# EAGLE board highbay (EAGLE 9.3.2)
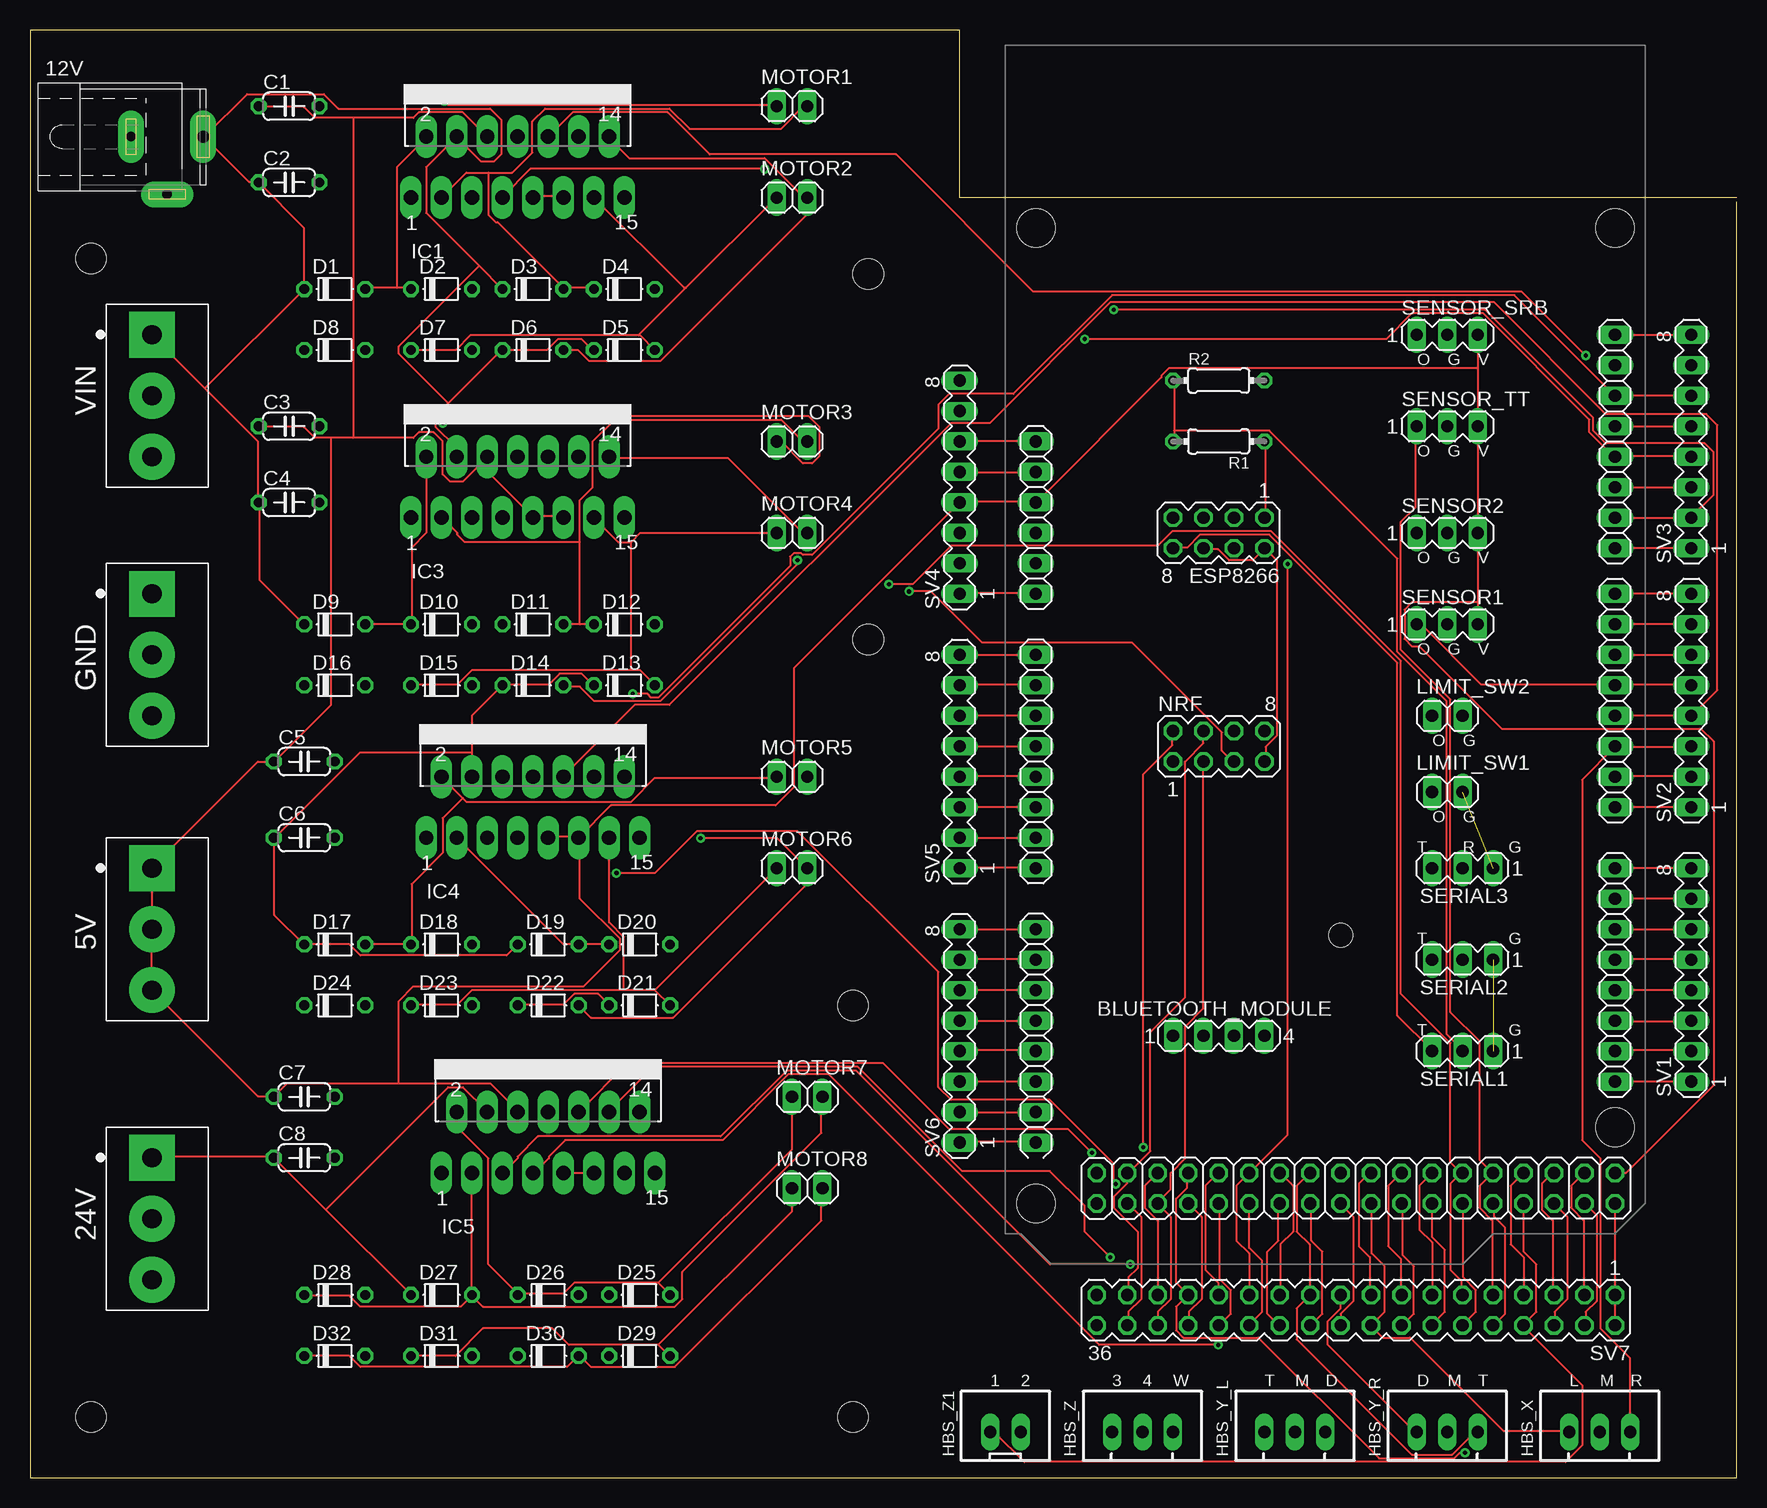
[diagram p0: board, top side]
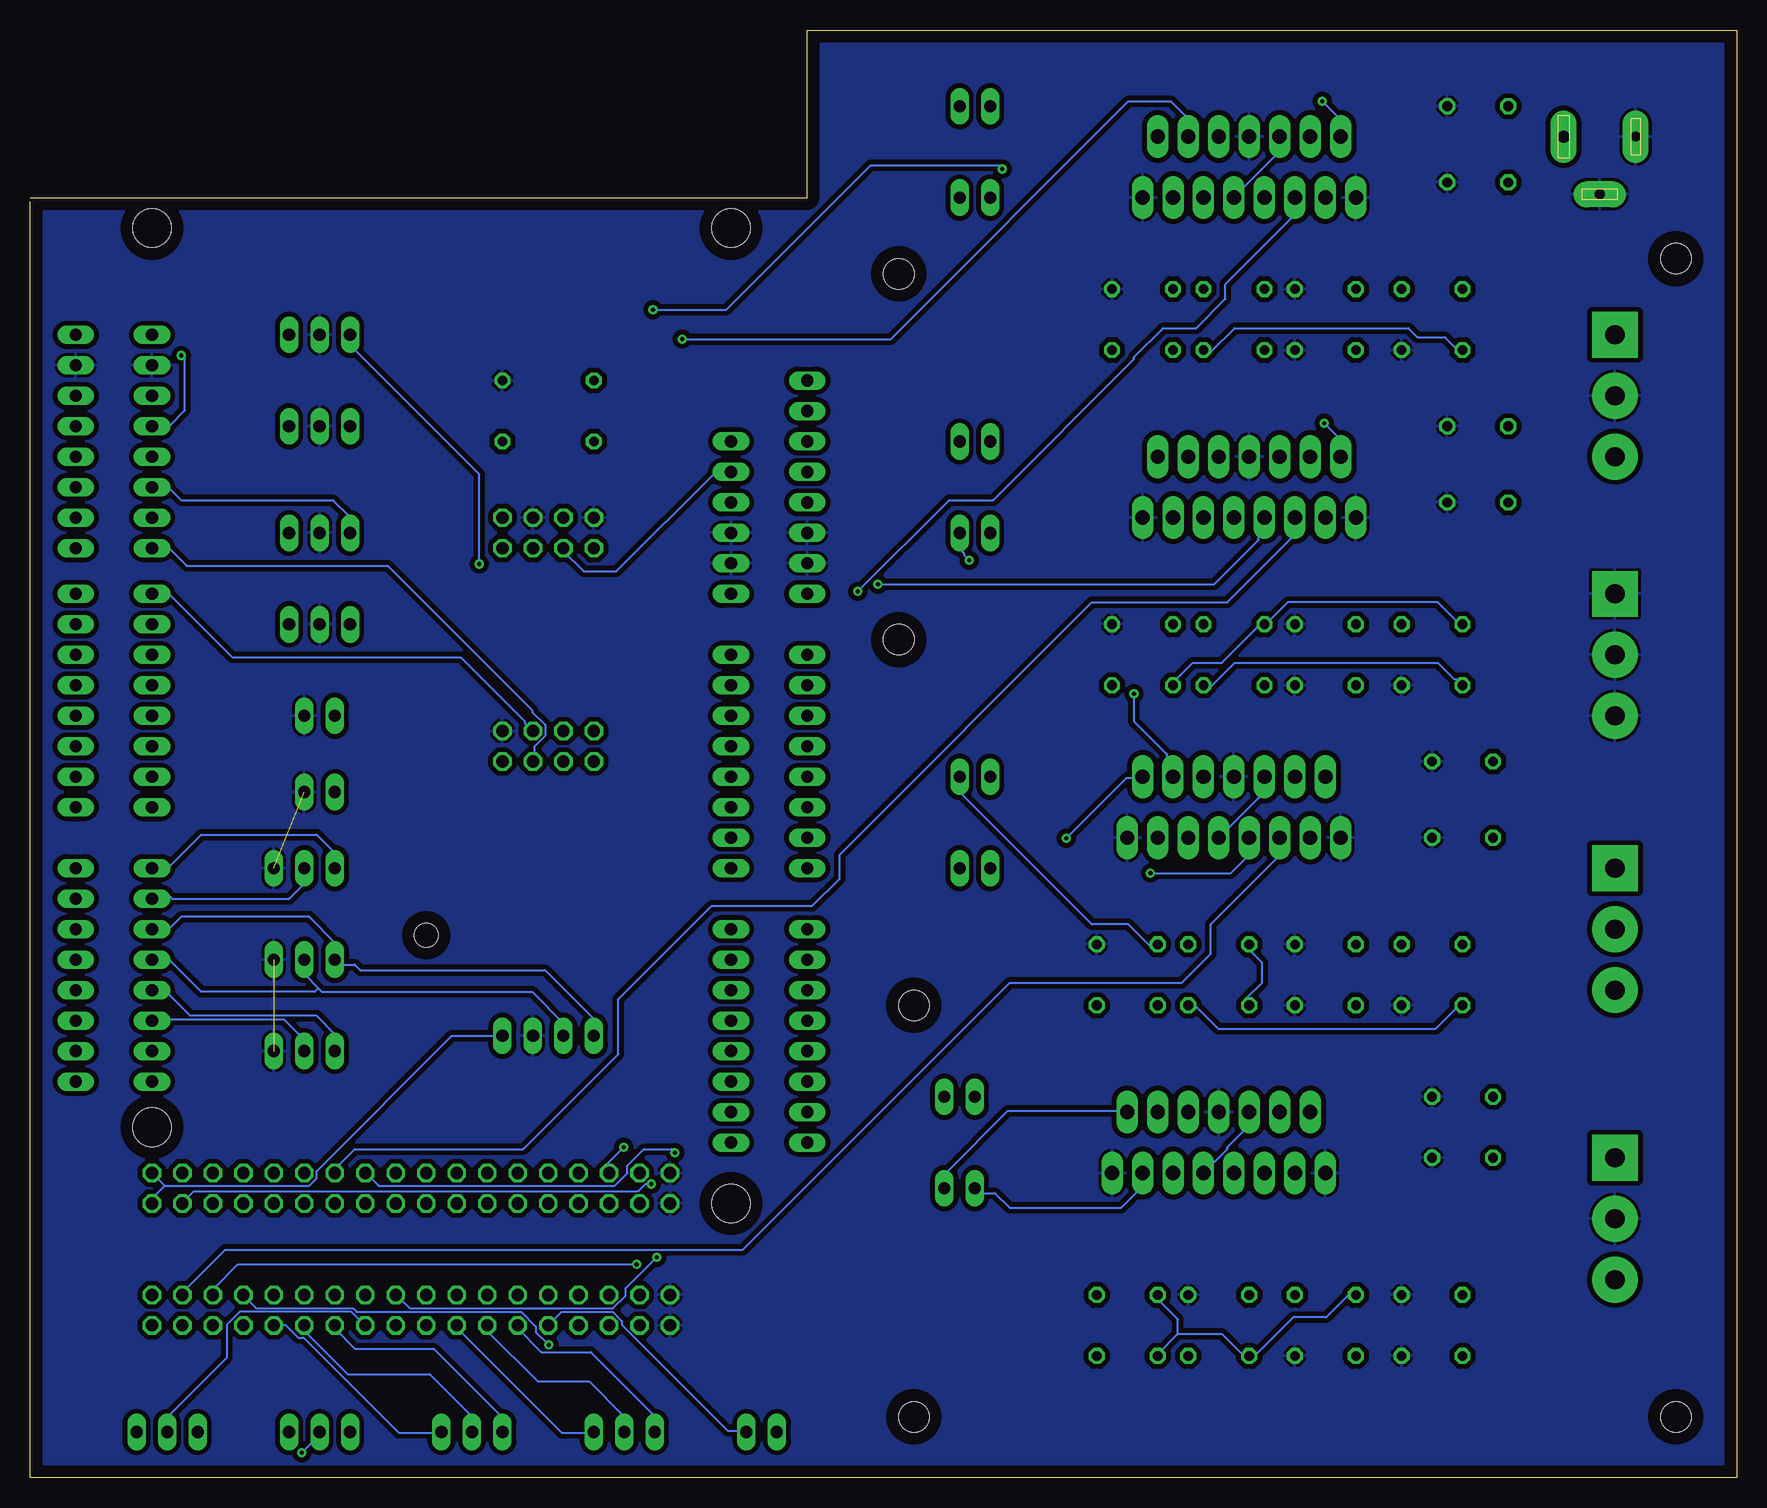
[diagram p1: board, bottom side, seen from below]

Size 142.24 x 120.65 mm. Coordinates in mm from the lower left corner, seen from the top.
Outline: 142.22,106.35 142.22,0 0,0 0,120.65 77.47,120.65 77.47,106.68 142.24,106.68
Copper layers (1*16): Top 0.035mm / dielectric 1.5mm / Bottom 0.035mm
Design rules "default": minimum track width 6mil, minimum drill 0.35mm, track to track 6mil, track to pad 6mil, pad to pad 6mil, via to via 6mil, smd to smd 6mil, copper to edge 40mil, drill to drill 6mil, minimum pad ring 10mil, minimum via ring 8mil, stop-mask expansion 4mil, vias tented up to drill 0mil, thermal gap 10mil
Holes 2.54 mm at 5.08,5.08 5.08,101.6 69.85,100.33 68.58,5.08 68.58,39.37 69.85,69.85

## Footprints (pad centres in the part's own frame; a part is rotated, then mirrored left to right if it is on the bottom)
TERMINALBLOCK_PLUGGABLE-3-5.08MM = drill 1.6 pad 3.81 square: 1 -5.08,0 | drill 1.6 pad 3.81: 2 0,0; 3 5.08,0
SPC4077 = drill 0.8 pad 2.184 long: 1 -3,0; 2 0,-4.8 | drill 1 pad 2.184 long: 3 3,0
MA04-1 = drill 1.016 long: 1 -3.81,0; 2 -1.27,0; 3 1.27,0; 4 3.81,0
C050-024X044 = drill 0.813 octagon: 1 -2.54,0; 2 2.54,0
D-5 = drill 0.813 octagon: A 2.54,0; C -2.54,0
MA04-2 = drill 1.016 octagon: 1 -3.81,-1.27; 2 -3.81,1.27; 3 -1.27,-1.27; 4 -1.27,1.27; 5 1.27,-1.27; 6 1.27,1.27; 7 3.81,-1.27; 8 3.81,1.27
JST-XH-03-PACKAGE-LONG-PAD = drill 1.016 long: 1 -2.54,0; 2 0,0; 3 2.54,0
JST-XH-02-PACKAGE-LONG-PAD = drill 1.016 long: 1 -1.27,0; 2 1.27,0
MULTIWATT-15 = drill 1.2 long: 1 -8.89,-7.62; 2 -7.62,-2.54; 3 -6.35,-7.62; 4 -5.08,-2.54; 5 -3.81,-7.62; 6 -2.54,-2.54; 7 -1.27,-7.62; 8 0,-2.54; 9 1.27,-7.62; 10 2.54,-2.54; 11 3.81,-7.62; 12 5.08,-2.54; 13 6.35,-7.62; 14 7.62,-2.54; 15 8.89,-7.62
MEGA_ARDUINO_1 = drill 1.016 long: 1 33.02,2.54; 2 35.56,2.54; 3 38.1,2.54; 4 40.64,2.54; 5 43.18,2.54; 6 45.72,2.54; 7 50.8,2.54; 8 53.34,2.54; 9 55.88,2.54; 10 58.42,2.54; 11 60.96,2.54; 12 63.5,2.54; 13 66.04,2.54; 14 68.58,2.54; 15 73.66,2.54; 16 76.2,2.54; 17 78.74,2.54; 18 81.28,2.54; 19 83.82,2.54; 20 86.36,2.54; 21 88.9,2.54; 22 91.44,2.54; 23 86.36,50.8; 24 83.82,50.8; 25 81.28,50.8; 26 78.74,50.8; 27 76.2,50.8; 28 73.66,50.8; 29 71.12,50.8; 30 68.58,50.8; 31 63.5,50.8; 32 60.96,50.8; 33 58.42,50.8; 34 55.88,50.8; 35 53.34,50.8; 36 50.8,50.8; 37 48.26,50.8; 38 45.72,50.8; 39 41.91,50.8; 40 39.37,50.8; 41 36.83,50.8; 42 34.29,50.8; 43 31.75,50.8; 44 29.21,50.8; 45 26.67,50.8; 46 24.13,50.8 | drill 1.016 octagon: 47 93.98,50.8; 48 96.52,50.8; 49 93.98,48.26; 50 96.52,48.26; 51 93.98,45.72; 52 96.52,45.72; 53 93.98,43.18; 54 96.52,43.18; 55 93.98,40.64; 56 96.52,40.64; 57 93.98,38.1; 58 96.52,38.1; 59 93.98,35.56; 60 96.52,35.56; 61 93.98,33.02; 62 96.52,33.02; 63 93.98,30.48; 64 96.52,30.48; 65 93.98,27.94; 66 96.52,27.94; 67 93.98,25.4; 68 96.52,25.4; 69 93.98,22.86; 70 96.52,22.86; 71 93.98,20.32; 72 96.52,20.32; 73 93.98,17.78; 74 96.52,17.78; 75 93.98,15.24; 76 96.52,15.24; 77 93.98,12.7; 78 96.52,12.7; 79 93.98,10.16; 80 96.52,10.16; 81 93.98,7.62; 82 96.52,7.62 | hole 3.2: 15.24,50.8; 15.24,2.54; 90.17,50.8; 96.52,2.54 | hole 2: 74.168,27.94
1X02 = drill 1.016 long: 1 -1.27,0; 2 1.27,0
0204/7 = drill 0.813 octagon: 1 -3.81,0; 2 3.81,0
MA03-1 = drill 1.016 long: 1 -2.54,0; 2 0,0; 3 2.54,0
MA08-1 = drill 1.016 long: 1 -8.89,0; 2 -6.35,0; 3 -3.81,0; 4 -1.27,0; 5 1.27,0; 6 3.81,0; 7 6.35,0; 8 8.89,0
MA18-2 = drill 1.016 octagon: 1 -21.59,-1.27; 2 -21.59,1.27; 3 -19.05,-1.27; 4 -19.05,1.27; 5 -16.51,-1.27; 6 -16.51,1.27; 7 -13.97,-1.27; 8 -13.97,1.27; 9 -11.43,-1.27; 10 -11.43,1.27; 11 -8.89,-1.27; 12 -8.89,1.27; 13 -6.35,-1.27; 14 -6.35,1.27; 15 -3.81,-1.27; 16 -3.81,1.27; 17 -1.27,-1.27; 18 -1.27,1.27; 19 1.27,-1.27; 20 1.27,1.27; 21 3.81,-1.27; 22 3.81,1.27; 23 6.35,-1.27; 24 6.35,1.27; 25 8.89,-1.27; 26 8.89,1.27; 27 11.43,-1.27; 28 11.43,1.27; 29 13.97,-1.27; 30 13.97,1.27; 31 16.51,-1.27; 32 16.51,1.27; 33 19.05,-1.27; 34 19.05,1.27; 35 21.59,-1.27; 36 21.59,1.27

## Placement (x,y rotation side)
5V  691311500003  [TERMINALBLOCK_PLUGGABLE-3-5.08MM]  10.16,45.72 270 top
12V  [SPC4077]  11.43,111.76 0 top
24V  691311500003  [TERMINALBLOCK_PLUGGABLE-3-5.08MM]  10.16,21.59 270 top
BLUETOOTH_MODULE  [MA04-1]  99.06,36.83 0 top
C1  100nF  [C050-024X044]  21.59,114.3 0 top
C2  100nF  [C050-024X044]  21.59,107.95 0 top
C3  100nF  [C050-024X044]  21.59,87.63 0 top
C4  100nF  [C050-024X044]  21.59,81.28 0 top
C5  100nF  [C050-024X044]  22.86,59.69 0 top
C6  100nF  [C050-024X044]  22.86,53.34 0 top
C7  100nF  [C050-024X044]  22.86,31.75 0 top
C8  100nF  [C050-024X044]  22.86,26.67 0 top
D1  [D-5]  25.4,99.06 0 top
D2  [D-5]  34.29,99.06 0 top
D3  [D-5]  41.91,99.06 0 top
D4  [D-5]  49.53,99.06 0 top
D5  [D-5]  49.53,93.98 0 top
D6  [D-5]  41.91,93.98 0 top
D7  [D-5]  34.29,93.98 0 top
D8  [D-5]  25.4,93.98 0 top
D9  [D-5]  25.4,71.12 0 top
D10  [D-5]  34.29,71.12 0 top
D11  [D-5]  41.91,71.12 0 top
D12  [D-5]  49.53,71.12 0 top
D13  [D-5]  49.53,66.04 0 top
D14  [D-5]  41.91,66.04 0 top
D15  [D-5]  34.29,66.04 0 top
D16  [D-5]  25.4,66.04 0 top
D17  [D-5]  25.4,44.45 0 top
D18  [D-5]  34.29,44.45 0 top
D19  [D-5]  43.18,44.45 0 top
D20  [D-5]  50.8,44.45 0 top
D21  [D-5]  50.8,39.37 0 top
D22  [D-5]  43.18,39.37 0 top
D23  [D-5]  34.29,39.37 0 top
D24  [D-5]  25.4,39.37 0 top
D25  [D-5]  50.8,15.24 0 top
D26  [D-5]  43.18,15.24 0 top
D27  [D-5]  34.29,15.24 0 top
D28  [D-5]  25.4,15.24 0 top
D29  [D-5]  50.8,10.16 0 top
D30  [D-5]  43.18,10.16 0 top
D31  [D-5]  34.29,10.16 0 top
D32  [D-5]  25.4,10.16 0 top
ESP8266  [MA04-2]  99.06,78.74 180 top
GND  691311500003  [TERMINALBLOCK_PLUGGABLE-3-5.08MM]  10.16,68.58 270 top
HBS_X  JST-XH-03-PIN-LONG-PAD  [JST-XH-03-PACKAGE-LONG-PAD]  130.81,3.81 0 top
HBS_Y_L  JST-XH-03-PIN-LONG-PAD  [JST-XH-03-PACKAGE-LONG-PAD]  105.41,3.81 0 top
HBS_Y_R  JST-XH-03-PIN-LONG-PAD  [JST-XH-03-PACKAGE-LONG-PAD]  118.11,3.81 0 top
HBS_Z  JST-XH-03-PIN-LONG-PAD  [JST-XH-03-PACKAGE-LONG-PAD]  92.71,3.81 0 top
HBS_Z1  JST-XH-02-PIN-LONG-PAD  [JST-XH-02-PACKAGE-LONG-PAD]  81.28,3.81 0 top
IC1  L298  [MULTIWATT-15]  40.64,114.3 0 top
IC2  [MEGA_ARDUINO_1]  81.28,119.38 270 top
IC3  L298  [MULTIWATT-15]  40.64,87.63 0 top
IC4  L298  [MULTIWATT-15]  41.91,60.96 0 top
IC5  L298  [MULTIWATT-15]  43.18,33.02 0 top
LIMIT_SW1  [1X02]  118.11,57.15 0 top
LIMIT_SW2  [1X02]  118.11,63.5 0 top
MOTOR1  [1X02]  63.5,114.3 0 top
MOTOR2  [1X02]  63.5,106.68 0 top
MOTOR3  [1X02]  63.5,86.36 0 top
MOTOR4  [1X02]  63.5,78.74 0 top
MOTOR5  [1X02]  63.5,58.42 0 top
MOTOR6  [1X02]  63.5,50.8 0 top
MOTOR7  [1X02]  64.77,31.75 0 top
MOTOR8  [1X02]  64.77,24.13 0 top
NRF  [MA04-2]  99.06,60.96 0 top
R1  1k  [0204/7]  99.06,86.36 180 top
R2  2k2  [0204/7]  99.06,91.44 0 top
SENSOR1  [MA03-1]  118.11,71.12 0 top
SENSOR2  [MA03-1]  118.11,78.74 0 top
SENSOR_SRB  [MA03-1]  118.11,95.25 0 top
SENSOR_TT  [MA03-1]  118.11,87.63 0 top
SERIAL1  [MA03-1]  119.38,35.56 180 top
SERIAL2  [MA03-1]  119.38,43.18 180 top
SERIAL3  [MA03-1]  119.38,50.8 180 top
SV1  [MA08-1]  138.43,41.91 90 top
SV2  [MA08-1]  138.43,64.77 90 top
SV3  [MA08-1]  138.43,86.36 90 top
SV4  [MA08-1]  77.47,82.55 90 top
SV5  [MA08-1]  77.47,59.69 90 top
SV6  [MA08-1]  77.47,36.83 90 top
SV7  [MA18-2]  110.49,13.97 180 top
VIN  691311500003  [TERMINALBLOCK_PLUGGABLE-3-5.08MM]  10.16,90.17 270 top

## Library data of the parts
5V 24V GND VIN = Terminal Blocks; CREATED_BY: PCBLayout.com; DIGIKEY_PART_NO: 732-2053-ND; MANUFACTURER: WURTH ELEKTRONIK; MPN: 691311500003
12V = con-jack; OC_FARNELL: unknown; OC_NEWARK: unknown
BLUETOOTH_MODULE ESP8266 NRF SENSOR1 SENSOR2 SENSOR_SRB SENSOR_TT SERIAL1-SERIAL3 SV1-SV7 = con-lstb; OC_FARNELL: unknown; OC_NEWARK: unknown
C1-C8 = rcl
D1-D32 = diode
HBS_X HBS_Y_L HBS_Y_R HBS_Z HBS_Z1 = Rembrandt Electronics - JST XH Connectors v1-0
IC1 IC3-IC5 = st-microelectronics; MPN: L298N; OC_FARNELL: 1589425; OC_NEWARK: 32M1527
IC2 = arduino
LIMIT_SW1 LIMIT_SW2 MOTOR1-MOTOR8 = pinhead
R1 R2 = rcl; SPICEPREFIX: R

## Nets
2: HBS_X.3 IC2.33 SV2.3
3: IC2.34 IC4.10 SV2.4
3V3: ESP8266.2 ESP8266.6 IC2.2 NRF.7 SV4.5
4: IC2.35 SENSOR1.1 SV2.5
5: IC2.36 SV2.6
5V: 5V.1 5V.2 5V.3 BLUETOOTH_MODULE.4 C1.1 C3.1 C5.1 C7.1 IC1.6 IC1.9 IC1.11 IC2.3 IC2.47 IC2.48 IC3.6 IC3.9 IC3.11 IC4.6 IC4.9 IC4.11 IC5.6 IC5.9 IC5.11 SENSOR1.3 SENSOR2.3 SENSOR_SRB.3 SENSOR_TT.3 SV4.4 SV7.1 SV7.2
6: IC2.37 SV2.7
7: IC2.38 NRF.6 SV2.8
8: IC1.5 IC2.39 NRF.5 SV3.1
9: IC1.7 IC2.40 SV3.2
10: IC2.41 SENSOR2.1 SV3.3
11: IC1.12 IC2.42 SV3.4
12: IC1.10 IC2.43 SV3.5
13: IC2.44 IC4.12 SV3.6
20: LIMIT_SW1.1
21: LIMIT_SW2.1
22: IC2.49 IC4.5 SV7.3
23: IC2.50 IC4.7 SV7.4
24: IC2.51 IC5.5 SV7.5
24V: 24V.1 C8.1 D25.C D27.C D29.C D30.C IC5.4
25: IC2.52 SV7.6
26: IC2.53 IC5.7 SV7.7
27: HBS_Z1.1 IC2.54 SV7.8
28: IC2.55 SENSOR_TT.1 SV7.9
29: HBS_Y_L.3 IC2.56 SV7.10
30: IC2.57 IC3.7 SV7.11
31: HBS_Y_L.2 IC2.58 SV7.12
32: IC2.59 IC3.5 SV7.13
33: HBS_Y_L.1 IC2.60 SV7.14
34: IC2.61 IC5.10 SV7.15
35: HBS_X.2 IC2.62 SV7.16
36: IC2.63 IC5.12 SV7.17
37: HBS_X.1 IC2.64 SV7.18
38: HBS_Y_R.1 SV7.19
39: IC2.66 SV7.20
40: HBS_Y_R.3 IC2.67 SV7.21
41: HBS_Z.3 IC2.68 SV7.22
42: IC2.69 SV7.23
43: HBS_Z.2 IC2.70 SV7.24
44: IC2.71 SENSOR_SRB.1 SV7.25
45: HBS_Z.1 IC2.72 SV7.26
46: IC2.73 SV7.27
47: HBS_Z1.2 IC2.74 SV7.28
48: HBS_Y_R.2 IC2.75 SV7.29
49: IC2.76 SV7.30
A0: IC2.7 SV5.8
A1: IC2.8 SV5.7
A2: IC2.9 SV5.6
A3: IC2.10 SV5.5
A4: IC2.11 SV5.4
A5: IC2.12 SV5.3
A6: IC2.13 SV5.2
A7: IC2.14 SV5.1
A8: IC2.15 SV6.8
A9: IC2.16 SV6.7
A10: IC2.17 SV6.6
A11: IC2.18 SV6.5
A12: IC2.19 SV6.4
A13: IC2.20 SV6.3
A14: IC2.21 SV6.2
A15: IC2.22 SV6.1
AREF: IC2.46 SV3.8
GND: 12V.1 12V.2 24V.2 BLUETOOTH_MODULE.3 C1.2 C2.2 C3.2 C4.2 C5.2 C6.2 C7.2 C8.2 D2.A D4.A D7.A D8.A D10.A D12.A D15.A D16.A D18.A D20.A D23.A D24.A D26.A D28.A D31.A D32.A ESP8266.3 ESP8266.7 GND.1 GND.2 GND.3 IC1.1 IC1.8 IC1.15 IC2.4 IC2.5 IC2.45 IC2.81 IC2.82 IC3.1 IC3.8 IC3.15 IC4.1 IC4.8 IC4.15 IC5.1 IC5.8 IC5.15 LIMIT_SW1.2 LIMIT_SW2.2 NRF.8 R2.2 SENSOR1.2 SENSOR2.2 SENSOR_SRB.2 SENSOR_TT.2 SERIAL1.1 SERIAL2.1 SERIAL3.1 SV3.7 SV4.2 SV4.3 SV7.35 SV7.36 VIN.2
MISO: IC2.77 NRF.2 SV7.31
MOSI: IC2.78 NRF.3 SV7.32
N$1: D1.A D2.C IC1.2 MOTOR1.1
N$2: D3.A D4.C IC1.3 MOTOR1.2
N$3: D6.A D8.C IC1.14 MOTOR2.2
N$4: D5.A D7.C IC1.13 MOTOR2.1
N$5: ESP8266.1 R1.1
N$7: D9.A D10.C IC3.2 MOTOR3.1
N$8: D11.A D12.C IC3.3 MOTOR3.2
N$9: D14.A D16.C IC3.14 MOTOR4.2
N$10: D13.A D15.C IC3.13 MOTOR4.1
N$11: D17.A D18.C IC4.2 MOTOR5.1
N$12: D19.A D20.C IC4.3 MOTOR5.2
N$13: D22.A D24.C IC4.14 MOTOR6.2
N$14: D21.A D23.C IC4.13 MOTOR6.1
N$15: D25.A D26.C IC5.2 MOTOR7.1
N$16: D27.A D28.C IC5.3 MOTOR7.2
N$17: SV4.8
N$18: SV4.7
N$19: D30.A D32.C IC5.14 MOTOR8.2
N$20: D29.A D31.C IC5.13 MOTOR8.1
N$21: IC2.65
N$22: NRF.1
R0: IC2.31 SV2.1
R1: IC2.25 R1.2 R2.1 SERIAL1.2 SV1.3
R2: BLUETOOTH_MODULE.2 IC2.27 SERIAL2.2 SV1.5
R3: IC2.29 SERIAL3.2 SV1.7
RESET: IC2.1 SV4.6
SCK: IC2.79 NRF.4 SV7.33
SCL: IC2.23 SV1.1
SDA: IC2.24 SV1.2
SS: IC2.80 SV7.34
T0: IC2.32 SV2.2
T1: ESP8266.8 IC2.26 SERIAL1.3 SV1.4
T2: BLUETOOTH_MODULE.1 IC2.28 SERIAL2.3 SV1.6
T3: IC2.30 SERIAL3.3 SV1.8
VI: IC2.6 SV4.1
VIN: 12V.3 C2.1 C4.1 C6.1 D1.C D3.C D5.C D6.C D9.C D11.C D13.C D14.C D17.C D19.C D21.C D22.C IC1.4 IC3.4 IC4.4 VIN.1

## Tracks (layer width: path | path; a pad name or v marks a point on that pad's centre or on a via)
2
  Top 0.152: 132.08,60.91 129.34,58.17 129.34,28.14 130.86,26.62 130.86,12.45 133.3,10.01 133.3,3.91 HBS_X.3 | 132.08,60.91 138.33,60.91 SV2.3 | 132.08,60.91 IC2.33
3
  Top 0.152: IC2.34 SV2.4 138.48,63.5 140.61,65.63 140.61,87.73 139.7,88.65 131.32,88.65 122.02,97.94 90.02,97.94 79.96,87.88 76.76,87.88 53.29,64.41 50.39,64.41 44.45,58.47 IC4.10
3V3
  Top 0.152: SV4.5 77.52,83.77 83.77,83.77 IC2.2 | NRF.7 102.97,59.69 102.97,60.91 103.89,61.82 103.89,76.45 ESP8266.2 102.82,77.37 101.91,76.45 99.92,76.45 99.01,77.37 97.79,77.37 ESP8266.6
  Bottom 0.152: ESP8266.6 97.79,77.22 96.11,75.54 93.37,75.54 85.14,83.77 83.92,83.77 IC2.2
4
  Top 0.152: 132.08,66.09 138.33,66.09 SV2.5 | SENSOR1.1 115.93,71.12 120.95,66.09 132.08,66.09 | 132.08,66.09 IC2.35
5
  Top 0.152: IC2.36 132.08,68.53 138.33,68.53 SV2.6
5V
  Top 0.152: IC3.11 44.45,80.11 42.01,80.11 IC3.9 41.86,80.11 37.59,84.38 37.44,84.38 | 26.92,86.67 31.95,86.67 32.41,87.12 33.63,87.12 34.39,86.36 34.39,83.62 35,83.01 36.07,83.01 37.44,84.38 | 26.92,86.67 25.09,86.67 | 25.09,86.67 23.72,86.67 22.81,87.58 19.15,87.58 C3.1 | 37.44,84.38 38.05,84.99 IC3.6 37.44,84.38 | IC1.9 42.01,106.78 44.45,106.78 IC1.11 | 26.92,113.34 31.95,113.34 32.41,113.79 36.07,113.79 IC1.6 | 26.92,113.34 23.72,113.34 22.81,114.25 19.15,114.25 C1.1 | 26.92,113.34 26.92,86.67 | IC4.9 43.23,53.44 45.67,53.44 IC4.11 | IC5.11 IC5.9 | 30.73,32.87 21.44,32.87 C7.1 20.22,31.8 19,31.8 5V.3 5V.2 5V.1 10.16,50.85 19,59.69 C5.1 20.37,59.69 25.09,64.41 25.09,86.67 | 30.73,32.87 38.35,32.87 40.64,30.58 IC5.6 | 30.73,32.87 30.73,39.73 31.95,40.95 46.13,40.95 49.17,43.99 49.17,44.91 45.82,48.26 45.82,53.29 IC4.11 | SV7.2 SV7.1 IC2.48 | 120.65,72.95 SENSOR2.3 SENSOR_TT.3 120.65,92.46 | 120.65,72.95 SENSOR1.3 | SENSOR_SRB.3 120.65,92.46 | 120.65,92.46 94.89,92.46 94.29,91.85 94.29,91.69 83.92,81.33 IC2.3 83.77,81.33 77.52,81.33 SV4.4 63.65,67.46 63.65,57.56 62.13,56.03 48.41,56.03 IC4.11 | IC2.47 132.99,25.4 140.31,32.72 140.31,61.37 139.24,62.43 122.63,62.43 115.77,69.29 115.16,69.29 114.55,69.9 114.55,72.34 115.16,72.95 120.65,72.95
  Bottom 0.152: IC1.9 41.86,106.78 38.2,110.44 38.2,111.66 IC1.6 | IC4.9 39.42,57.1 39.42,58.32 IC4.6 | IC5.6 40.64,29.36 42.47,27.53 42.47,27.38 IC5.9 | BLUETOOTH_MODULE.4 107.09,36.83 118.36,25.55 118.36,24.94 118.97,24.33 131.01,24.33 | IC2.47 131.01,24.33 | IC2.48 132.08,23.27 131.01,24.33
6
  Top 0.152: SV2.7 IC2.37
7
  Top 0.152: SV2.8 138.33,73.71 132.08,73.71 IC2.38
  Bottom 0.152: NRF.6 100.99,62.89 100.99,63.04 106.32,68.38 125.37,68.38 130.56,73.56 132.08,73.56 IC2.38
8  (via drill 0.35)
  Top 0.152: SV3.1 138.33,77.52 132.08,77.52 IC2.39 | v73.25,73.86 75.08,73.86 79.35,69.6 91.85,69.6 99.31,62.13 99.31,60.6 100.23,59.69 NRF.5
  Bottom 0.152: NRF.5 100.23,59.69 100.23,60.91 99.31,61.82 99.31,62.74 100.38,63.81 100.38,63.96 112.42,76 129.18,76 130.56,77.37 132.08,77.37 IC2.39 | IC1.5 36.83,105.26 42.62,99.47 42.62,98.25 45.06,95.81 47.8,95.81 50.24,93.37 50.24,93.22 61.98,81.48 65.63,81.48 v73.25,73.86
9  (via drill 0.35)
  Top 0.152: IC2.40 132.08,79.96 138.33,79.96 SV3.2 138.48,80.11 140.31,81.94 140.31,85.45 139.55,86.21 131.32,86.21 130.25,87.27 130.25,88.34 121.26,97.33 v90.32,97.33 | v61.21,109.07 41.71,109.07 39.42,106.78 IC1.7
  Bottom 0.152: v61.21,109.07 61.52,109.37 72.19,109.37 84.23,97.33 v90.32,97.33
10
  Top 0.152: IC2.41 SV3.3
  Bottom 0.152: IC2.41 130.71,82.55 129.64,81.48 116.99,81.48 115.62,80.11 115.62,78.74 SENSOR2.1
11  (via drill 0.35)
  Top 0.152: SV3.4 138.33,85.14 132.08,85.14 IC2.42 132.08,84.99 129.95,87.12 129.95,88.19 121.11,97.03 115.16,97.03 113.03,94.89 v87.88,94.89
  Bottom 0.152: v87.88,94.89 70.51,94.89 50.7,114.71 47.19,114.71 45.82,113.34 45.82,111.81 IC1.12
12  (via drill 0.35)
  Top 0.152: IC2.43 132.08,87.58 138.33,87.58 SV3.5 | IC1.10 45.21,113.79 53.14,113.79 56.64,110.29 72.19,110.29 83.62,98.86 124.31,98.86 v129.64,93.52
  Bottom 0.152: v129.64,93.52 129.34,93.22 129.34,88.95 130.56,87.73 132.08,87.73 IC2.43
13  (via drill 0.35)
  Top 0.152: SV3.6 IC2.44 123.7,98.55 90.17,98.55 81.94,90.32 76.61,90.32 75.69,89.41 75.69,87.43 65.18,76.91 64.41,76.91 64.26,77.06 63.65,77.06 63.35,76.76 63.35,76 52.38,65.02 51.77,65.02 51.46,65.33 v50.24,65.33
  Bottom 0.152: v50.24,65.33 50.24,63.04 47.5,60.3 47.5,60.15 47.04,59.69 47.04,58.47 IC4.12
22
  Top 0.152: SV7.3 129.49,15.34 129.49,21.44 128.42,22.5 128.42,24.33 129.49,25.4 IC2.49
  Bottom 0.152: IC4.5 38.2,53.29 38.2,51.77 43.84,46.13 43.84,43.69 46.28,41.25 60.6,41.25 82.86,19 125.98,19 129.64,15.34 SV7.3
23  (via drill 0.35)
  Top 0.152: SV7.4 129.64,12.75 129.64,13.82 130.56,14.73 130.56,21.89 129.64,22.81 IC2.50 | v48.87,50.39 52.07,50.39 55.58,53.9 63.96,53.9 75.69,42.16 75.69,32.56 76.76,31.5 84.99,31.5 90.32,26.16 90.32,24.64 v90.48,24.49
  Bottom 0.152: IC4.7 40.64,51.92 42.16,50.39 v48.87,50.39 | v90.48,24.49 90.93,24.49 91.54,23.88 128.57,23.88 129.49,22.96 IC2.50
24  (via drill 0.35)
  Top 0.152: SV7.5 126.9,15.34 126.9,21.44 125.98,22.35 125.98,24.49 126.9,25.4 IC2.51 | v91.69,17.78 84.99,17.78 68.83,33.93 63.04,33.93 57.56,28.45 42.32,28.45 40.64,26.77 40.64,26.62 39.42,25.4 IC5.5
  Bottom 0.152: v91.69,17.78 124.92,17.78 126.9,15.8 126.9,15.34 SV7.5
24V
  Top 0.152: 24.64,22.35 C8.1 20.22,26.77 10.16,26.77 24V.1 | 24.64,22.35 D27.C | 24.64,22.35 34.85,32.56 36.07,32.56 38.05,30.58 IC5.4
  Bottom 0.152: 46.58,11.99 42.93,11.99 41.1,10.16 D30.C 40.18,10.16 36.98,13.36 34.24,13.36 32.41,15.19 31.8,15.19 D27.C | 46.58,11.99 48.26,10.31 D29.C | D25.C 48.26,14.88 46.58,13.21 46.58,11.99
25
  Top 0.152: IC2.52 128.12,21.74 128.12,14.88 127.05,13.82 127.05,12.75 SV7.6
26  (via drill 0.35)
  Top 0.152: SV7.7 124.46,18.39 123.39,19.46 123.39,24.33 IC2.53 | v99.01,11.07 89.1,11.07 66.55,33.63 63.2,33.63 57.71,28.14 44.6,28.14 43.23,26.77 43.23,26.62 42.01,25.4 IC5.7
  Bottom 0.152: v99.01,11.07 100.08,12.14 100.08,12.6 101.3,13.82 115.01,13.82 115.32,14.12 123.39,14.12 124.46,15.19 SV7.7
27
  Top 0.152: HBS_Z1.1 80.11,3.76 80.42,3.76 82.86,1.32 127.97,1.32 129.34,2.69 129.34,7.72 124.46,12.6 SV7.8 124.46,12.75 125.53,13.82 125.53,17.78 124.46,18.85 IC2.54
28
  Top 0.152: 121.87,25.4 120.8,24.33 120.8,22.5 121.87,21.44 121.87,15.34 SV7.9 | 121.87,25.4 120.8,26.47 120.8,36.37 118.36,38.81 118.36,64.87 114.25,68.99 114.25,79.65 115.47,80.87 115.47,87.58 SENSOR_TT.1 | 121.87,25.4 IC2.55
29
  Top 0.152: IC2.56 122.02,22.81 122.02,21.74 122.94,20.83 122.94,13.66 122.02,12.75 SV7.10
  Bottom 0.152: HBS_Y_L.3 108,3.76 111.51,3.76 119.43,11.68 119.89,11.68 120.95,12.75 121.87,12.75 SV7.10
30  (via drill 0.35)
  Top 0.152: 119.28,25.4 118.36,24.49 118.36,17.32 119.28,16.41 119.28,15.34 SV7.11 | v71.58,74.47 73.56,74.47 76.76,77.67 93.98,77.67 95.2,78.89 103.43,78.89 114.25,68.07 114.25,40.34 118.36,36.22 118.36,26.31 119.28,25.4 | 119.28,25.4 IC2.57
  Bottom 0.152: v71.58,74.47 43.54,74.47 39.88,78.13 39.88,78.28 39.42,78.74 39.42,79.96 IC3.7
31
  Top 0.152: SV7.12 120.5,13.82 120.5,15.65 119.43,16.71 119.43,22.81 IC2.58
  Bottom 0.152: HBS_Y_L.2 105.41,5.13 108.92,8.64 115.77,8.64 119.28,12.14 119.28,12.6 SV7.12
32
  Top 0.152: SV7.13 116.84,19.61 115.77,20.68 115.77,24.33 IC2.59
  Bottom 0.152: IC3.5 36.83,78.59 42.47,72.95 53.75,72.95 74.78,51.92 74.78,49.94 77.06,47.65 85.45,47.65 93.22,39.88 93.22,35.31 101.14,27.38 115.16,27.38 116.84,25.7 IC2.59
33
  Top 0.152: IC2.60 116.84,20.07 117.91,19 117.91,13.82 116.84,12.75 SV7.14
  Bottom 0.152: SV7.14 116.84,12.45 115.16,10.77 108.61,10.77 102.97,5.13 102.97,3.91 HBS_Y_L.1
34  (via drill 0.35)
  Top 0.152: SV7.15 114.25,15.34 114.25,18.24 113.18,19.3 113.18,24.33 114.25,25.4 IC2.61 | IC5.10 49.78,34.54 71.12,34.54 76.61,29.06 86.51,29.06 v88.49,27.08
  Bottom 0.152: v88.49,27.08 88.8,27.38 91.08,27.38 92.46,26.01 92.46,25.4 93.52,24.33 113.18,24.33 114.25,25.4 IC2.61
35
  Top 0.152: IC2.62 114.4,22.81 114.4,18.54 115.32,17.63 115.32,13.66 114.4,12.75 SV7.16
  Bottom 0.152: HBS_X.2 130.71,3.91 130.71,5.13 125.83,10.01 125.83,12.75 124.77,13.82 115.47,13.82 114.4,12.75 SV7.16
36  (via drill 0.35)
  Top 0.152: SV7.17 111.66,15.34 111.66,18.39 110.74,19.3 110.74,24.49 111.66,25.4 IC2.63 | v90.02,18.39 87.88,20.52 87.88,22.66 84.99,25.55 77.67,25.55 68.99,34.24 51.92,34.24 48.26,30.58 IC5.12
  Bottom 0.152: v90.02,18.39 92.61,15.8 92.61,15.19 93.67,14.12 110.59,14.12 111.66,15.19 SV7.17
37
  Top 0.152: HBS_X.1 128.27,3.91 122.78,3.91 115.01,11.68 112.73,11.68 111.81,12.6 SV7.18 112.88,13.82 112.88,17.63 111.81,18.69 111.81,22.81 IC2.64
38
  Top 0.152: SV7.19 109.22,14.12 108.15,13.06 108.15,11.07 115.47,3.76 HBS_Y_R.1
39
  Top 0.152: SV7.20 109.22,13.66 110.29,14.73 110.29,21.74 109.22,22.81 IC2.66
40
  Top 0.152: IC2.67 106.63,25.4 105.56,24.33 105.56,20.52 106.63,19.46 106.63,15.34 SV7.21 105.56,14.12 105.56,11.53 115.16,1.93 118.52,1.93 120.35,3.76 120.65,3.76 HBS_Y_R.3
41
  Top 0.152: IC2.68 106.78,22.81 106.78,19.76 107.7,18.85 107.7,13.66 106.78,12.75 SV7.22
  Bottom 0.152: HBS_Z.3 95.35,3.76 97.94,3.76 106.78,12.6 SV7.22
42
  Top 0.152: SV7.23 104.19,15.34 104.19,19.46 105.26,20.52 105.26,24.33 104.19,25.4 IC2.69
43
  Top 0.152: IC2.70 104.04,22.81 104.04,19.76 103.12,18.85 103.12,13.66 104.04,12.75 SV7.24
  Bottom 0.152: HBS_Z.2 92.76,3.91 92.76,5.13 95.66,8.03 99.92,8.03 104.04,12.14 104.04,12.6 SV7.24
44  (via drill 0.35)
  Top 0.152: SV7.25 101.6,18.69 100.53,19.76 100.53,24.33 IC2.71 104.8,28.6 v104.8,76.15
  Bottom 0.152: v104.8,76.15 104.8,83.62 115.47,94.28 115.47,95.2 SENSOR_SRB.1
45
  Top 0.152: IC2.72 101.6,19.15 102.67,18.09 102.67,13.82 101.6,12.75 SV7.26
  Bottom 0.152: HBS_Z.1 90.17,5.13 95.5,10.46 99.62,10.46 101.6,12.45 SV7.26
46
  Top 0.152: SV7.27 99.01,15.34 99.01,16.26 97.94,17.32 97.94,24.33 99.01,25.4 IC2.73
47
  Top 0.152: IC2.74 99.16,22.81 99.16,16.56 100.08,15.65 100.08,13.66 99.16,12.75 SV7.28
  Bottom 0.152: SV7.28 97.94,13.82 93.67,13.82 92.91,13.06 92.91,12.75 84.07,3.91 82.55,3.91 HBS_Z1.2
48  (via drill 0.35)
  Top 0.152: v119.58,2.08 119.13,2.08 118.67,1.63 112.42,1.63 102.36,11.68 96.11,11.68 95.5,12.29 95.5,14.27 96.42,15.19 SV7.29 95.5,16.26 95.5,23.27 96.42,24.18 96.42,25.4 IC2.75
  Bottom 0.152: v119.58,2.08 118.21,3.45 118.21,3.76 HBS_Y_R.2
49
  Top 0.152: IC2.76 97.64,21.74 97.64,14.88 96.57,13.82 96.57,12.75 SV7.30
A0
  Top 0.152: SV5.8 77.52,68.53 83.77,68.53 IC2.7
A1
  Top 0.152: SV5.7 77.52,66.09 83.77,66.09 IC2.8
A2
  Top 0.152: IC2.9 SV5.6
A3
  Top 0.152: SV5.5 77.52,60.91 83.77,60.91 IC2.10
A4
  Top 0.152: SV5.4 77.52,58.47 83.77,58.47 IC2.11
A5
  Top 0.152: IC2.12 SV5.3
A6
  Top 0.152: SV5.2 77.52,53.29 83.77,53.29 IC2.13
A7
  Top 0.152: SV5.1 77.52,50.85 83.77,50.85 IC2.14
A8
  Top 0.152: SV6.8 77.52,45.67 83.77,45.67 IC2.15
A9
  Top 0.152: SV6.7 77.52,43.23 83.77,43.23 IC2.16
A10
  Top 0.152: IC2.17 SV6.6
A11
  Top 0.152: SV6.5 77.52,38.05 83.77,38.05 IC2.18
A12
  Top 0.152: SV6.4 77.52,35.61 83.77,35.61 IC2.19
A13
  Top 0.152: IC2.20 SV6.3
A14
  Top 0.152: SV6.2 77.52,30.43 83.77,30.43 IC2.21
A15
  Top 0.152: SV6.1 77.52,27.99 83.77,27.99 IC2.22
AREF
  Top 0.152: IC2.46 132.08,95.2 138.33,95.2 SV3.8
GND  (2 unrouted)
  Bottom 0.152: IC5.8 43.23,30.43 43.23,30.35
  pour Bottom (isolate 0.406): 0,120.65 77.47,120.65 77.47,106.68 142.24,106.68 142.24,1.27 142.24,0 0,0
MISO  (via drill 0.35)
  Top 0.152: SV7.31 93.98,21.44 92.91,22.5 92.91,24.33 IC2.77 | v92.76,27.53 92.76,58.62 95.2,61.06 95.2,62.13 NRF.2
  Bottom 0.152: v92.76,27.53 94.13,26.16 94.13,25.55 IC2.77
MOSI
  Top 0.152: SV7.32 93.98,13.82 95.05,14.88 95.05,21.74 93.98,22.81 IC2.78 93.98,22.96 95.05,24.03 95.05,25.4 96.27,26.62 96.27,37.59 97.79,39.12 NRF.3
N$1  (via drill 0.35)
  Top 0.152: 30.58,99.16 31.65,99.16 D2.C | 30.58,99.16 27.99,99.16 D1.A | v34.54,114.71 34.85,114.4 62.13,114.4 MOTOR1.1 | 30.58,99.16 30.58,109.22 33.02,111.66 IC1.2
  Bottom 0.152: v34.54,114.71 33.02,113.18 IC1.2
N$2
  Top 0.152: 44.45,99.16 46.89,99.16 D4.C | 38.2,108.76 36.37,108.76 IC1.3 | 38.2,108.76 40.18,108.76 41.86,110.44 41.86,113.03 42.93,114.1 53.29,114.1 54.97,112.42 62.59,112.42 64.41,114.25 64.72,114.25 MOTOR1.2 | 44.45,99.16 38.96,104.65 38.81,104.65 38.2,105.26 38.2,108.76 | 44.45,99.16 D3.A
N$3
  Top 0.152: IC1.14 48.26,111.66 49.94,109.98 61.21,109.98 64.41,106.78 64.72,106.78 MOTOR2.2 64.72,106.63 64.72,105.26 52.53,93.07 46.58,93.07 45.67,93.98 D6.A
  Bottom 0.152: D8.C 23.27,93.98 24.33,95.05 26.62,95.05 27.38,95.81 41.86,95.81 43.84,93.83 44.3,93.83 D6.A
N$4
  Top 0.152: D7.C 35.46,93.98 36.68,95.2 50.7,95.2 | 50.7,95.2 50.85,95.2 D5.A | 50.7,95.2 54.66,99.16 | 54.66,99.16 62.13,106.63 MOTOR2.1 | IC1.13 54.51,99.16 54.66,99.16
N$5
  Top 0.152: R1.1 102.97,86.36 102.97,80.11 ESP8266.1
N$7  (via drill 0.35)
  Top 0.152: D9.A D10.C 31.8,71.12 31.8,77.52 33.02,78.74 IC3.2 | MOTOR3.1 62.59,86.36 64.41,84.53 65.18,84.53 65.79,85.14 65.79,87.58 64.87,88.49 35,88.49 v34.39,87.88
  Bottom 0.152: v34.39,87.88 33.02,86.51 IC3.2
N$8
  Top 0.152: D12.C 45.82,71.12 | 45.82,71.12 D11.A | MOTOR3.2 64.41,86.36 62.59,88.19 48.72,88.19 46.89,86.36 46.89,82.55 45.82,81.48 45.82,77.98 | 45.82,71.12 45.82,77.98 | 45.82,77.98 36.22,77.98 35.61,78.59 35.61,78.74 34.39,79.96 IC3.3
N$9  (via drill 0.35)
  Top 0.152: MOTOR4.2 64.41,78.74 58.17,84.99 48.26,84.99 IC3.14 | v63.96,76.45 63.96,76.15 52.53,64.72 47.04,64.72 45.82,65.94 44.45,65.94 D14.A
  Bottom 0.152: D16.C 22.96,66.09 23.42,66.55 23.57,66.55 24.94,67.92 41.86,67.92 43.84,65.94 44.45,65.94 D14.A | v63.96,76.45 64.41,76.91 64.41,77.06 64.72,77.37 64.72,78.74 MOTOR4.2
N$10
  Top 0.152: MOTOR4.1 50.85,78.74 50.09,77.98 | 50.09,77.98 49.02,77.98 IC3.13 | 50.09,67.31 50.85,67.31 52.07,66.09 D13.A | 50.09,67.31 36.83,67.31 35.61,66.09 31.8,66.09 D15.C | 50.09,67.31 50.09,77.98
N$11
  Top 0.152: D17.A D18.C 31.8,44.45 31.8,49.48 34.39,52.07 34.39,54.97 36.07,56.64 | IC4.2 36.07,56.64 | 36.07,56.64 36.37,56.34 50.09,56.34 52.07,58.32 62.13,58.32 MOTOR5.1
N$12
  Top 0.152: D20.C D19.A 44.45,44.45 IC4.3
  Bottom 0.152: D20.C 48.41,44.3 48.87,44.3 50.7,46.13 53.75,46.13 64.72,57.1 64.72,58.32 MOTOR5.2
N$13  (via drill 0.35)
  Top 0.152: D22.A 46.74,38.35 53.59,38.35 64.72,49.48 64.72,50.7 MOTOR6.2 62.28,53.29 v55.88,53.29
  Bottom 0.152: D24.C 22.96,39.27 23.27,39.27 25.09,37.44 43.23,37.44 45.06,39.27 45.67,39.27 D22.A | v55.88,53.29 50.85,58.32 49.63,58.32 IC4.14
N$14
  Top 0.152: 52.07,40.64 49.48,40.64 | 49.48,40.64 36.83,40.64 35.61,39.42 31.8,39.42 D23.C | D21.A 52.07,40.64 | 52.07,40.64 MOTOR6.1 | IC4.13 48.26,46.28 49.48,45.06 49.48,40.64
N$15
  Top 0.152: 40.64,15.34 44.45,15.34 45.36,16.26 52.38,16.26 | 52.38,16.26 53.29,15.34 D25.A | MOTOR7.1 63.5,27.38 52.38,16.26 | 40.64,15.34 38.2,17.78 38.2,26.62 35.61,29.21 35.61,30.43 IC5.2 | 40.64,15.34 D26.C
N$16
  Top 0.152: 36.83,15.19 35.92,14.27 27.53,14.27 26.62,15.19 22.96,15.19 D28.C | 36.83,15.19 37.74,14.27 53.75,14.27 54.36,14.88 54.36,17.17 65.94,28.75 65.94,31.65 MOTOR7.2 | 36.83,15.19 D27.A IC5.3
N$19
  Top 0.152: D32.C 26.62,10.16 27.53,9.25 44.76,9.25 45.67,10.16 D30.A 45.82,10.16 46.74,9.25 53.75,9.25 65.94,21.44 65.94,24.03 MOTOR8.2
  Bottom 0.152: IC5.14 50.85,30.58 60.76,30.58 65.94,25.4 65.94,24.18 MOTOR8.2
N$20
  Top 0.152: D31.C 35.46,10.16 37.74,12.45 43.54,12.45 44.91,11.07 52.38,11.07 | 52.38,11.07 53.29,10.16 D29.A | MOTOR8.1 63.5,22.2 52.38,11.07
  Bottom 0.152: IC5.13 49.63,25.4 49.63,24.18 51.31,22.5 60.6,22.5 61.82,23.72 63.2,23.72 63.5,24.03 MOTOR8.1
R0
  Top 0.152: SV2.1 IC2.31
R1
  Top 0.152: 95.35,87.27 95.35,91.39 R2.1 | 95.35,87.27 95.35,86.36 R1.2 | SV1.3 138.33,38.05 132.08,38.05 IC2.25 | 95.35,87.27 103.28,87.27 113.94,76.61 113.94,68.83 118.06,64.72 118.06,36.98 119.43,35.61 SERIAL1.2
  Bottom 0.152: SERIAL1.2 119.43,35.61 119.43,36.52 121.11,38.2 132.08,38.2 IC2.25
R2
  Top 0.152: IC2.27 132.08,43.23 138.33,43.23 SV1.5
  Bottom 0.152: BLUETOOTH_MODULE.2 97.79,37.9 100.38,40.49 117.91,40.49 118.21,40.79 | 118.21,40.79 119.28,41.86 119.28,43.08 SERIAL2.2 | 118.21,40.79 118.52,40.49 127.97,40.49 130.56,43.08 132.08,43.08 IC2.27
R3
  Top 0.152: SV1.7 IC2.29
  Bottom 0.152: IC2.29 131.93,48.41 130.56,48.41 130.4,48.26 120.65,48.26 119.43,49.48 119.43,50.7 SERIAL3.2
RESET
  Top 0.152: IC2.1 SV4.6
SCK
  Top 0.152: SV7.33 91.54,15.34 91.54,16.71 92.3,17.48 92.3,20.52 90.32,22.5 90.32,23.42 91.39,24.49 91.39,25.4 IC2.79 91.54,25.4 93.37,27.23 93.37,37.13 96.27,40.03 96.27,59.69 97.79,61.21 NRF.4
SCL
  Top 0.152: SV1.1 IC2.23
SDA
  Top 0.152: IC2.24 132.08,35.61 138.33,35.61 SV1.2
SS
  Top 0.152: SV7.34 91.54,12.75 91.54,13.82 92.61,14.88 92.61,21.74 91.54,22.81 IC2.80
T0
  Top 0.152: IC2.32 132.08,58.47 138.33,58.47 SV2.2
T1
  Top 0.152: SV1.4 IC2.26 | ESP8266.8 95.35,77.52 96.42,77.52 97.48,78.59 103.28,78.59 113.94,67.92 113.94,38.51 116.84,35.61 SERIAL1.3
  Bottom 0.152: IC2.26 131.01,40.64 128.88,38.51 118.36,38.51 116.84,36.98 SERIAL1.3
T2
  Top 0.152: IC2.28 132.08,45.67 138.33,45.67 SV1.6
  Bottom 0.152: BLUETOOTH_MODULE.1 95.35,36.83 95.35,38.35 99.31,42.32 114.71,42.32 115.16,42.77 116.54,42.77 116.84,43.08 SERIAL2.3 116.84,44.6 118.97,46.74 129.64,46.74 130.56,45.82 132.08,45.82 IC2.28
T3
  Top 0.152: SV1.8 138.33,50.85 132.08,50.85 IC2.30
  Bottom 0.152: SERIAL3.3 116.84,52.07 118.36,53.59 127.97,53.59 130.71,50.85 132.08,50.85 IC2.30
VI
  Top 0.152: SV4.1 77.52,73.71 83.77,73.71 IC2.6
VIN
  Top 0.152: D13.C 46.89,66.09 45.97,67 44.14,67 43.23,66.09 39.42,66.09 D14.C 36.83,63.5 36.83,60.45 | 36.83,60.45 IC4.4 | 20.37,53.29 20.37,46.89 22.81,44.45 D17.C 26.62,44.45 27.53,43.54 39.73,43.54 D19.C | D22.C 40.64,39.42 44.45,39.42 45.36,40.34 47.35,40.34 48.26,39.42 D21.C | 36.83,60.45 27.53,60.45 20.37,53.29 | 20.37,53.29 C6.1 | 37.44,100.99 33.02,105.41 33.02,109.22 IC1.4 35.61,111.66 37.59,109.68 38.66,109.68 39.27,110.29 39.27,113.18 38.35,114.1 25.7,114.1 24.49,115.32 18.09,115.32 14.58,111.81 12V.3 14.58,111.66 18.24,108 19,108 C2.1 22.81,104.19 22.81,99.16 D1.C 14.58,90.78 | 37.44,100.99 D3.C | D5.C 46.89,93.98 45.97,94.89 43.99,94.89 43.08,93.98 D6.C 39.27,93.98 34.85,89.56 | 34.85,89.56 33.78,88.49 33.78,87.58 35.46,85.9 35.46,85.14 IC3.4 | 37.44,100.99 30.73,94.28 30.73,93.67 34.85,89.56 | D9.C 22.81,71.12 19.15,74.78 19.15,81.18 C4.1 19,81.33 19,86.36 14.58,90.78 | 14.58,90.78 10.16,95.2 VIN.1
  Bottom 0.152: D13.C 46.89,66.09 46.89,66.4 45.36,67.92 42.93,67.92 39.73,71.12 D11.C 39.27,71.12 37.44,72.95 24.94,72.95 23.11,71.12 D9.C | D19.C 40.64,43.99 39.57,42.93 39.57,41.25 40.79,40.03 40.79,39.57 40.64,39.42 D22.C

## Text on the board
tPlace: O | G | V | O | G | V | O | G | V | O | G | V | O | G | O | G | T | R | G | T | G | T | G | 1 | 2 | 3 | 4 | W | T | M | D | D | M | T | L | M | R